# Altium PCB Flow_Pump.PcbDoc (part 2 of 3)
Units mm, origin at the board's own origin, x right, y up, seen from the top; angles counter-clockwise.
Board outline 210 x 210 mm, 2 copper layers (Top Layer, Bottom Layer); 275 components, 189 nets, 896 pads, 730 vias.
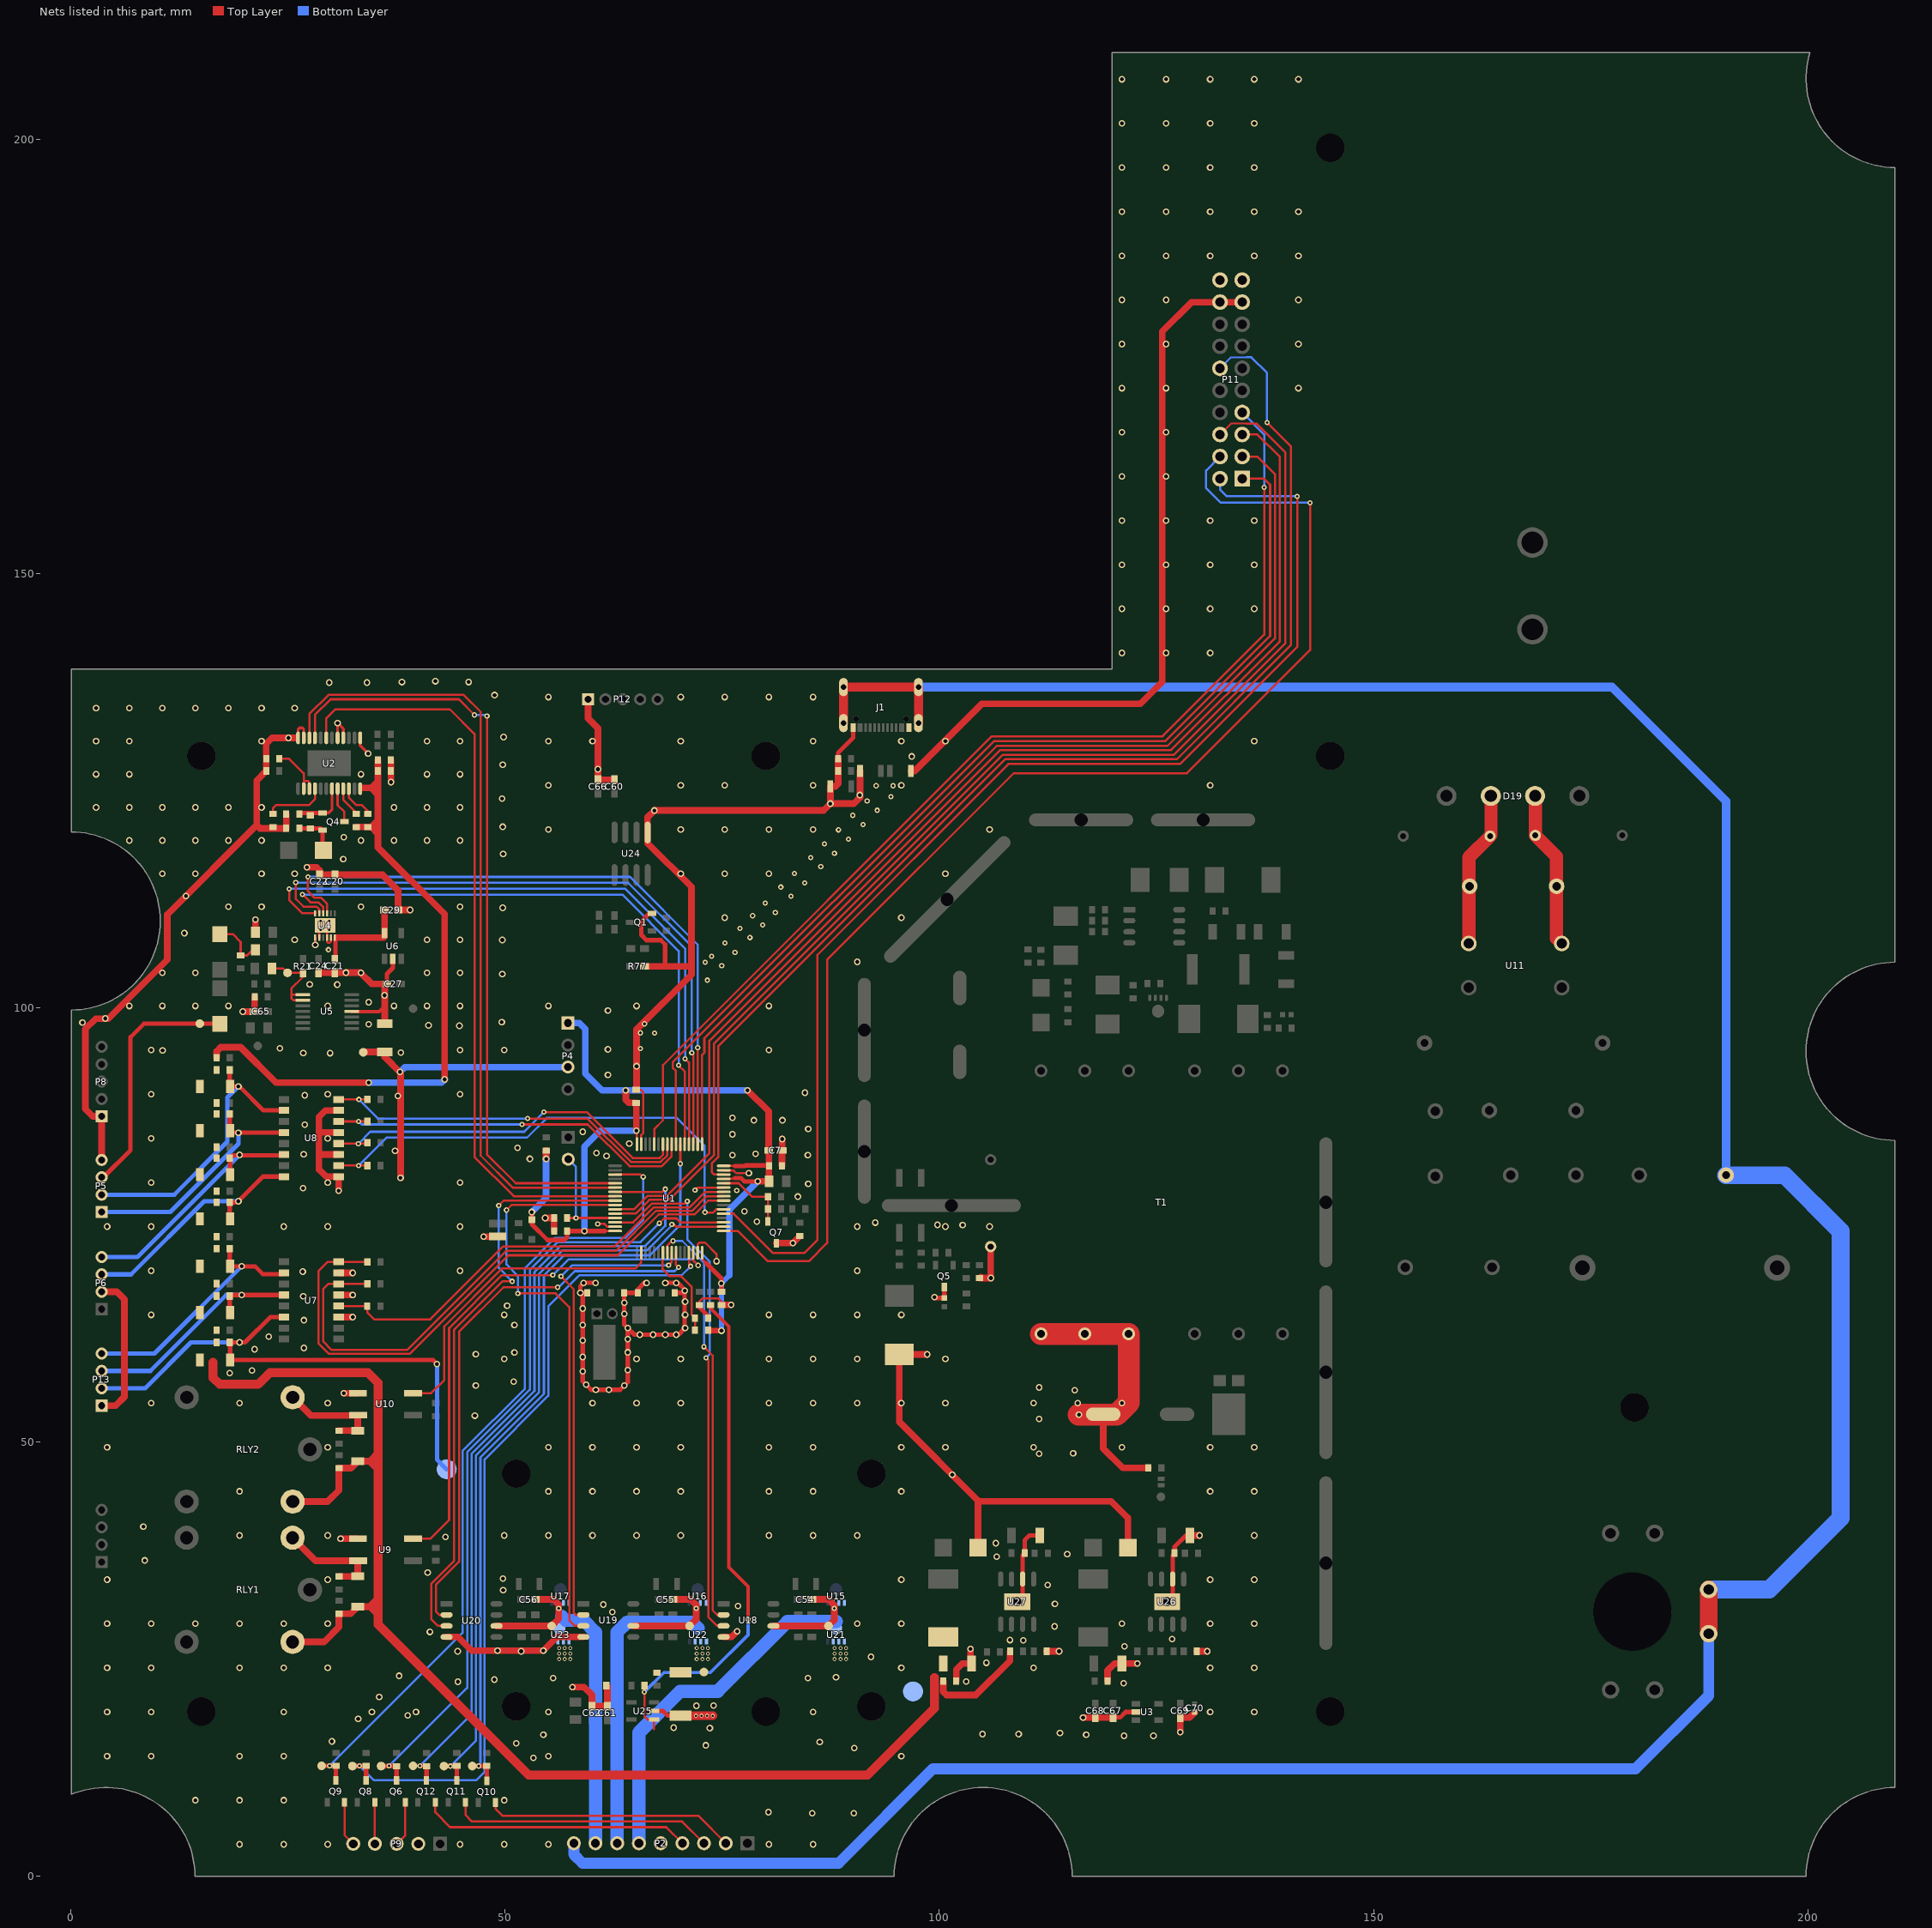
[diagram p2: the nets of this part, all layers, seen from the top]

## Via types
v1: diameter 0.762, hole 0.457, Top Layer to Bottom Layer, tented both sides, 554 vias
v2: diameter 0.61, hole 0.305, Top Layer to Bottom Layer, tented both sides, 99 vias
v3: diameter 0.45, hole 0.25, Top Layer to Bottom Layer, tented both sides, 70 vias
v4: diameter 0.5, hole 0.25, Top Layer to Bottom Layer, 4 vias
v5: diameter 1.5, hole 1, Top Layer to Bottom Layer, 2 vias
v6: diameter 1.27, hole 0.711, Top Layer to Bottom Layer, tented both sides, 1 vias

## Nets (pads, with @x,y where several pads share a name; then routed paths per layer and width w, separated by ;. In a path a pad name is that pad's centre, name@x,y a point inside that pad or via, vN(x,y) a via of type N, cw(c..) or ccw(c..) an arc to the next point about the centre after c; other vN are vias at no path point) (continued)
24V_F: C12.2 C13.2 C14.2 C15.2 C31.1 C32.1 C33.1 C34.1 C35.1 C36.1 C37.1 C79.2 C80.1 D8.2 D9.2 D10.2 D11.2 D12.2 D13.2 D15.2 D16.2 D17.2 L2.2 R26.2 R28.2 R30.2 R32.2 R34.2 R36.2 R40.2 R42.2 R43.2 R90.1 RLY1.4 RLY2.4 U2.24 | length 249.1
  Top Layer w0.762: R28.2@16.804,94.234 16.804,94.985 17.272,95.453 19.558,95.453 23.647,91.364 v1(34.29,91.364) ; RLY1.4@25.535,26.99 29.149,26.99 30.881,28.722 R42.2@30.881,30.231 32.222,30.231 D16.2@33.04,31.049 35.382,31.049 ; RLY2.4@25.547,43.149 29.56,43.149 30.881,44.47 R43.2@30.881,46.995 32.25,46.995 D17.2@33.04,47.785 35.382,47.785 ; C13.2@32.884,120.801 C12.2@34.195,120.801 35.338,120.801 35.362,120.777 ; 33.615,125.298 35.362,125.298 ; 35.357,120.039 34.595,120.801 35.357,121.563 ; 35.357,124.536 34.595,125.298 35.357,126.06 ; C14.2@35.362,128.524 C15.2@35.362,127.254 35.362,125.298 ; 35.484,29.972 34.392,31.064 35.484,32.156 ; 35.509,46.693 34.417,47.785 35.509,48.877 ; v1(43.053,91.745) 43.053,110.769 35.362,118.46 35.362,120.777 ; C80.1@100.457,22.479 100.457,21.26 100.838,20.879 104.216,20.879 108.153,24.816 R90.1@108.153,25.908 ; 35.362,120.777 35.362,125.298
  Top Layer w1.016: 16.383,59.182 16.383,57.404 17.145,56.642 21.59,56.642 22.936,57.988 34.214,57.988 35.382,56.82 35.382,47.785 35.382,31.049 35.382,29.007 52.73,11.659 91.744,11.659 99.441,19.356 99.441,22.86
  Bottom Layer w0.762: v1(34.29,91.364) 42.697,91.364 43.078,91.745 v1(43.053,91.745)
+3.3VA: C21.1 C29.1 U4.12 U6.5 | length 11.2
  Top Layer w0.508: C21.1@30.403,105.562 30.484,105.643 U4.12@30.484,108.074
  Top Layer w0.762: 30.611,108.074 36.004,108.074 36.138,108.207 U6.5@36.138,108.573 36.138,111.245 C29.1@36.131,111.252
AC_L: C43.2 C57.2 D19.2 U11.4 | length 18.2
  Top Layer w1.524: D19.2@168.631,124.308 168.631,119.841 171.08,117.391 C57.2@171.08,113.991 171.08,107.975 U11.4@171.668,107.387
AC_N: C57.1 C58.1 D19.3 U11.3 | length 18
  Top Layer w1.524: U11.3@160.968,107.387 160.968,117.31 163.53,119.872 D19.3@163.53,124.308
Adc_input: C23.2 R21.1 T8.1 U5.1 U5.2 | length 9.9
  Top Layer w0.254: C23.2@23.182,104.518 24.455,104.518 T8.1@24.96,104.013 26.713,104.013 26.713,103.529 25.4,102.216 25.4,101.473 ; U5.2@26.712,100.867 25.625,100.867 25.4,101.092 25.4,101.473 ; U5.1@26.712,101.517 25.444,101.517 25.4,101.473
AGND: C14.1 C15.1 C16.2 C17.2 C18.1 C19.1 C20.2 C21.2 C22.2 C24.2 C25.1 C27.2 C29.2 C65.2 P5.4 P8.1 R16.2 R20.1 R25.2 U2.1 U2.4 U2.5 U2.11 U2.12 U4.7 U4.8 U4.10 U4.11 U4.13 U5.11 U6.2 | length 124.7
  Top Layer w0.254: v1(28.153,107.223) U4.7@28.153,108.074 ; U4.8@28.603,108.074 28.603,108.799 U4.13@29.278,109.474 29.503,109.249 U4.10@29.503,108.074 29.503,107.581 29.616,107.467 29.794,107.467 29.951,107.624 U4.11@29.953,108.074
  Top Layer w0.33: U2.12@26.175,131.068 26.175,132.049 26.333,132.207 26.67,132.207 26.825,132.052 U2.11@26.825,131.068 ; U2.5@30.725,131.068 v1(30.725,132.757) 31.375,132.107 U2.4@31.375,131.068 ; U2.1@33.325,131.068 33.325,130.175 v1(34.239,129.261)
  Top Layer w0.381: U5.11@32.351,99.567 35.52,99.567 36.156,100.203
  Top Layer w0.508: C27.2@36.41,102.743 36.41,103.897 37.088,104.575 U6.2@37.088,105.623
  Top Layer w0.762: P5.4@3.556,82.477 P8.1@3.556,87.494 2.549,87.494 1.676,88.367 1.676,97.536 2.883,98.742 4.305,98.742 11.125,105.562 11.125,110.744 21.412,121.031 ; v1(19.802,99.552) C65.2@21.125,99.552 21.174,99.601 C25.1@21.174,101.242 ; v1(21.26,110.134) 21.26,108.705 R20.1@21.269,108.696 ; C19.1@24.808,122.301 C18.1@24.808,120.65 21.793,120.65 21.412,121.031 ; 25.908,131.068 23.194,131.068 22.511,130.385 C17.2@22.511,128.651 R16.2@22.511,127.254 21.412,126.155 21.412,121.031 ; v1(27.203,116.18) 28.296,116.18 28.643,115.832 C22.2@28.643,115.3 C20.2@30.421,115.3 35.906,115.3 37.68,113.527 C29.2@37.68,111.252 v1(39.065,111.252) ; C24.2@28.516,104.013 C21.2@30.403,104.013 v1@31.725,104.013 ; v1(31.699,104.038) 33.376,104.038 34.671,102.743 C27.2@36.41,102.743 36.156,102.489 36.156,100.203 36.156,98.164 R25.2@36.144,98.153 ; v1(36.862,125.977) C15.1@36.862,127.254 C14.1@36.862,128.524
  other v1: 44.755,97.917 41.199,97.968 34.315,98.095 1.346,98.298 49.632,98.335 3.988,98.755 6.731,100.203 10.541,100.203 14.351,100.203 18.161,100.203 29.591,100.203 37.211,100.203 41.021,100.203 44.831,100.203 34.315,100.635 36.131,101.422 30.683,102.667 27.508,102.692 49.682,103.886 10.541,104.013 14.351,104.013 33.401,104.013 41.021,104.013 44.831,104.013 49.682,107.798 25.781,107.823 41.021,107.823 44.831,107.823 13.081,108.585 49.733,111.506 18.161,111.633 21.971,111.633 33.401,111.633 44.831,111.633 13.259,112.852 10.541,115.443 14.351,115.443 21.971,115.443 25.781,115.443 31.375,117.119 49.784,117.704 6.731,119.253 10.541,119.253 14.351,119.253 18.161,119.253 21.971,119.253 33.401,119.253 37.211,119.253 41.021,119.253 44.831,119.253 31.445,119.634 49.733,120.828 2.921,123.063 6.731,123.063 10.541,123.063 14.351,123.063 18.161,123.063 21.971,123.063 37.211,123.063 41.021,123.063 44.831,123.063 49.657,124.079 2.921,126.873 6.731,126.873 33.401,126.873 41.021,126.873 44.831,126.873 49.733,127.965 2.921,130.683 6.731,130.683 21.971,130.683 41.021,130.683 44.831,130.683 25.07,131.068 49.835,131.166 2.921,134.493 6.731,134.493 10.541,134.493 14.351,134.493 18.161,134.493 21.971,134.493 25.781,134.493 48.793,135.992 29.769,137.439 34.112,137.439 38.125,137.49 45.822,137.49 41.986,137.592
  other v2: 29.667,106.68
  other v4: 28.778,108.974 29.778,108.974 28.778,109.974 29.778,109.974
AI0: D6.1 P5.3 T7.1 | length 28.6
  Top Layer w0.508: P5.3@3.556,80.477 3.769,80.477 6.883,83.591 6.883,96.622 8.415,98.153 T7.1@14.877,98.153 ; T7.1@14.859,98.171 T7.1@14.877,98.153 ; D6.1@17.166,98.153 T7.1@14.877,98.153
AO_BOOST: Q4.3 U2.20 | length 4.1
  Top Layer w0.254: U2.20@30.725,125.218 30.725,123.326 31.499,122.552 Q4.3@31.499,121.428
AO_IOUT: C19.2 Q4.1 R18.1 U2.19 | length 6.4
  Top Layer w0.254: 30.075,124.421 U2.19@30.075,125.218
  Top Layer w0.33: Q4.1@28.999,122.428 29.718,122.428 30.075,122.785 30.075,124.421
  Top Layer w0.508: C19.2@26.308,122.301 26.435,122.428 Q4.1@28.999,122.428
BOOT0: P1.2 R3.1 U1.61 | length 12.7
  Top Layer w0.254: R3.1@57.15,75.795 v2(58.166,75.795) U1.61@62.684,75.795
  Bottom Layer w0.254: P1.2@57.277,82.55 58.166,81.661 v2(58.166,75.795)
DI_0: C31.2 D9.1 P5.2 U8.2 | length 33.1
  Top Layer w0.508: C31.2@18.304,92.837 18.304,90.98 D9.1@18.352,90.932 19.431,90.932 22.188,88.175 U8.2@24.542,88.175
  Bottom Layer w0.508: P5.2@3.556,78.477 11.929,78.477 18.034,84.582 18.034,89.662 v1(19.304,90.932)
DI_1: C33.2 D11.1 P5.1 U8.4 | length 28.5
  Top Layer w0.508: C33.2@18.304,87.757 18.304,85.9 D11.1@18.352,85.852 18.569,85.635 U8.4@24.542,85.635
  Bottom Layer w0.508: P5.1@3.556,76.477 11.453,76.477 19.304,84.328 v1(19.304,85.598)
DI_2: C35.2 D13.1 P6.4 U8.6 | length 29.1
  Top Layer w0.508: D13.1@18.352,80.772 18.352,82.629 C35.2@18.304,82.677 18.641,83.014 24.542,83.014 U8.6@24.542,83.095
  Bottom Layer w0.508: P6.4@3.556,71.301 7.674,71.301 v1(19.431,83.058)
DI_3: C37.2 D15.1 P6.3 U8.8 | length 28.6
  Top Layer w0.508: D15.1@18.352,75.692 18.304,75.74 C37.2@18.304,77.597 19.177,77.597 22.135,80.555 U8.8@24.542,80.555
  Bottom Layer w0.508: P6.3@3.556,69.301 6.944,69.301 15.367,77.724 v1(19.304,77.724)
DI_4: C36.2 D8.1 P13.4 U7.2 | length 28.9
  Top Layer w0.508: C36.2@18.304,72.263 18.304,70.279 D8.1@18.352,70.231 21.209,70.231 22.098,69.342 U7.2@24.542,69.342
  Bottom Layer w0.508: P13.4@3.556,60.189 9.643,60.189 v1(19.685,70.231)
DI_5: C34.2 D10.1 P13.3 U7.4 | length 28.5
  Top Layer w0.508: D10.1@18.352,64.897 18.304,64.945 C34.2@18.304,66.802 ; U7.4@24.542,66.929 v1(19.685,66.929) 18.685,66.929 ; C34.2@18.304,66.802 18.431,66.675 18.685,66.929 ; C34.2@18.304,66.802 18.431,66.929 18.685,66.929
  Bottom Layer w0.508: P13.3@3.556,58.189 9.167,58.189 17.907,66.929 v1(19.685,66.929)
DI_6: C32.2 D12.1 P13.2 U7.6 U28.1 | length 64.1
  Top Layer w0.508: U7.6@24.542,64.389 22.987,64.389 20.066,61.468 C32.2@18.304,61.468 18.352,61.42 D12.1@18.352,59.436 41.707,59.436 v1(42.164,58.979)
  Bottom Layer w0.508: P13.2@3.556,56.189 8.564,56.189 13.843,61.468 v1(19.431,61.468) ; v1(42.164,58.979) 42.164,47.981 U28.1@43.282,46.863
DI_IN0: R29.2 U1.41 U8.16 | length 43.4
  Top Layer w0.254: U8.16@30.842,89.445 v2(33.172,89.445) R29.2@34.152,89.445 ; v2(52.603,87.249) 59.487,87.249 64.491,82.245 67.936,82.245 68.684,82.993 U1.41@68.684,84.295
  Bottom Layer w0.254: v2(33.172,89.445) 35.368,87.249 v2(52.603,87.249)
DI_IN1: R33.2 U1.40 U8.14 | length 43.3
  Top Layer w0.254: U8.14@30.842,86.905 v2(33.147,86.905) R33.2@34.152,86.905 ; v2(51.968,86.563) 59.538,86.563 64.338,81.763 68.047,81.763 69.184,82.9 U1.40@69.184,84.295
  Bottom Layer w0.254: v2(33.147,86.905) 33.489,86.563 v2(51.968,86.563)
DI_IN2: R37.2 U1.42 U8.12 | length 43.5
  Top Layer w0.254: U8.12@30.842,84.365 34.062,84.365 R37.2@34.152,84.455 ; v2(54.483,87.986) 59.411,87.986 64.694,82.702 67.818,82.702 68.184,83.068 U1.42@68.184,84.295
  Bottom Layer w0.254: v2(33.122,84.353) 34.493,85.725 52.222,85.725 v2(54.483,87.986)
DI_IN3: R41.2 U1.22 U8.10 | length 56.8
  Top Layer w0.254: U8.10@30.842,81.825 R41.2@34.152,81.825 ; v2(73.025,76.454) 73.076,76.403 73.944,76.403 74.336,76.795 U1.22@75.184,76.795
  Bottom Layer w0.254: v2(33.147,81.813) 36.373,85.039 52.527,85.039 54.813,87.325 69.774,87.325 72.974,84.125 72.974,76.473 72.993,76.454 v2(73.025,76.454)
DI_IN4: R27.2 U1.24 U7.16 | length 68.9
  Top Layer w0.254: R27.2@34.152,70.739 U7.16@30.842,70.739 29.591,70.739 28.516,69.664 28.516,61.375 29.743,60.147 39.04,60.147 50.394,71.501 62.992,71.501 67.692,76.201 69.876,76.201 69.878,76.2 71.801,76.2 73.396,77.795 U1.24@75.184,77.795
DI_IN5: R31.2 U1.25 U7.14 | length 65.2
  Top Layer w0.254: R31.2@34.152,68.199 U7.14@30.842,68.199 29.659,68.199 29.053,67.593 29.053,61.6 30.048,60.604 38.71,60.604 50.114,72.009 62.778,72.009 67.377,76.608 70.045,76.608 70.046,76.606 71.526,76.606 73.215,78.295 U1.25@75.184,78.295
DI_IN6: R35.2 U1.26 U7.12 | length 51.5
  Top Layer w0.254: U7.12@30.842,65.659 R35.2@34.15,65.659 34.15,64.91 34.925,64.135 41.402,64.135 49.784,72.517 62.611,72.517 67.108,77.014 70.213,77.014 70.214,77.013 71.252,77.013 73.034,78.795 U1.26@75.184,78.795
DIN_AO: U1.53 U2.9 | length 90.7
  Top Layer w0.254: U2.9@28.125,131.068 28.125,133.721 29.913,135.509 44.679,135.509 v2(46.482,133.706) ; v2(47.93,133.579) 47.93,83.109 51.244,79.795 U1.53@62.684,79.795
  Bottom Layer w0.254: v2(46.482,133.706) 47.904,133.706 47.93,133.68 v2(47.93,133.579)
DO0: C38.1 D16.1 RLY1.1 U9.4 | length 12.6
  Top Layer w0.762: RLY1.1@25.535,38.99 28.198,36.327 U9.4@33.093,36.327 33.04,36.274 D16.1@33.04,34.549 33.016,34.525 C38.1@30.881,34.525
DO1: C39.1 D17.1 RLY2.1 U10.4 | length 12.3
  Top Layer w0.762: RLY2.1@25.547,55.149 27.658,53.038 33.04,53.038 D17.1@33.04,51.285 33.012,51.313 C39.1@30.881,51.313
DO_ctrl_0: U1.14 U9.2 | length 61.1
  Top Layer w0.254: U9.2@39.418,38.867 41.382,38.867 43.561,41.046 43.561,63.119 49.657,69.215 v2(55.499,69.215) ; U1.14@71.684,71.795 71.684,70.891 v2(72.238,70.337)
  Bottom Layer w0.254: v2(55.499,69.215) 57.325,71.041 71.534,71.041 v2(72.238,70.337)
DO_ctrl_1: U1.2 U10.2 | length 37.3
  Top Layer w0.254: U10.2@39.418,55.631 41.509,55.631 43.002,57.125 43.002,63.322 49.657,69.977 65.024,69.977 65.684,70.637 U1.2@65.684,71.795
DOUT_AO: U1.54 U2.10 | length 92.3
  Top Layer w0.254: U2.10@27.475,131.068 27.475,133.811 29.681,136.017 45.237,136.017 47.193,134.061 47.193,82.982 50.88,79.295 U1.54@62.684,79.295
EA: P9.3 Q6.2 | length 5.2
  Top Layer w0.254: P9.3@37.527,3.75 38.516,4.739 Q6.2@38.516,8.543
EARTH: J1.1 P2.9 P14.1 P14.2 R53.1 | length 378.5
  Top Layer w1.016: J1.1@88.971,132.766 J1.1@88.971,136.916 J1.1@97.611,136.916 J1.1@97.611,132.766
  Top Layer w2.032: P14.1@188.595,27.94 P14.2@188.595,33.02
  Bottom Layer w1.016: J1.1@97.611,136.916 101.809,136.916 177.46,136.916 190.602,123.774 R53.1@190.602,80.721
  Bottom Layer w1.27: P2.9@57.92,3.81 57.92,2.532 58.928,1.524 88.417,1.524 99.263,12.37 180.162,12.37 188.595,20.803 P14.1@188.595,27.94
  Bottom Layer w2.032: P14.2@188.595,33.02 195.555,33.02 203.784,41.25 203.784,74.27 197.333,80.721 R53.1@190.602,80.721
EB: P9.4 Q8.2 | length 4.8
  Top Layer w0.254: Q8.2@35.01,8.543 35.01,3.766 P9.4@35.027,3.75
EXTPROC_SPI2_ADC_CS3: U1.34 U4.3 | length 76.6
  Top Layer w0.254: v2(27.305,115.062) 27.305,113.411 28.067,112.649 28.829,112.649 29.503,111.975 U4.3@29.503,110.874 ; U1.34@72.184,84.295 72.187,84.298 v2(72.187,95.402)
  Bottom Layer w0.254: v2(27.305,115.062) 64.389,115.062 72.187,107.264 v2(72.187,95.402)
EXTPROC_SPI2_MISO: U1.36 U4.6 | length 76.1
  Top Layer w0.254: v2(25.146,113.665) 25.146,112.415 26.687,110.874 U4.6@28.153,110.874 ; v2(70.739,94.132) 71.184,93.687 U1.36@71.184,84.295
  Bottom Layer w0.254: v2(25.146,113.665) 25.197,113.716 63.822,113.716 70.739,106.799 v2(70.739,94.132)
EXTPROC_SPI2_MOSI: U1.37 U4.4 | length 72.3
  Top Layer w0.254: v2(26.67,113.03) 26.67,113.076 27.605,112.141 28.521,112.141 29.053,111.609 U4.4@29.053,110.874 ; v2(70.002,93.37) 70.002,93.345 70.684,92.663 U1.37@70.684,84.295
  Bottom Layer w0.254: v2(26.67,113.03) 63.5,113.03 70.002,106.528 v2(70.002,93.37)
EXTPROC_SPI2_SCLK: U1.35 U4.5 | length 77
  Top Layer w0.254: v2(25.908,114.427) 25.908,112.522 26.797,111.633 28.321,111.633 28.603,111.351 U4.5@28.603,110.874 ; v2(71.501,94.818) 71.684,94.635 U1.35@71.684,84.295
  Bottom Layer w0.254: v2(25.908,114.427) 25.959,114.376 64.186,114.376 71.501,107.061 v2(71.501,94.818)
EZ: P9.5 Q9.2 | length 5.2
  Top Layer w0.254: Q9.2@31.531,8.543 31.531,4.746 P9.5@32.527,3.75
FAULT: P11.12 U1.30 | length 140.5
  Top Layer w0.254: U1.30@75.184,80.795 74.094,80.795 73.812,81.077 73.812,82.067 74.549,82.804 74.549,95.555 107.594,128.6 127.356,128.6 140.513,141.757 140.513,164.617 137.77,167.361 v2(137.744,167.361)
  Bottom Layer w0.203: P11.12@132.334,173.609 133.604,174.879 135.416,174.879
  Bottom Layer w0.254: 135.416,174.879 135.941,174.879 137.744,173.076 v2(137.744,167.361)
GND: C1.2 C2.2 C3.1 C4.1 C5.2 C6.2 C7.2 C8.1 C9.1 C10.1 C11.1 C40.2 C41.2 C48.2 C53.1 C59.1 C60.2 C61.2 C62.2 C64.1 C66.2 C67.2 C68.2 C69.2 C70.2 C71.2 C73.1 C74.1 C75.2 C76.2 C78.1 C79.1 C80.2 D2.1 D3.1 D4.1 D24.1 D29.1 D30.1 J1.A1 J1.A12 J1.B1 J1.B12 P2.5 P4.3 P6.2 P9.2 P11.17 P11.18 P11.19 P11.20 P12.1 P13.1 Q1.2 Q5.3 Q7.3 R3.2 R17.2 R25.1 R66.2 R77.1 R79.2 R85.2 R86.1 R89.2 SC1.2 T1.7 T1.8 T1.9 T3.1 U1.15 U1.27 U1.31 U1.47 U1.63 U3.2 U7.11 U7.13 U7.15 U8.9 U8.11 U8.13 U8.15 U9.3 U10.3 U18.4 U19.4 U20.4 U24.5 U25.2 U26.6 U26.9 U27.6 U27.9 U29.1 | length 519.1
  Top Layer w0.254: v2(60.681,75.108) 61.443,75.108 61.755,74.795 U1.63@62.684,74.795 ; C10.1@65.1,90.551 65.151,90.551 65.659,90.551 65.913,90.297 65.913,85.562 65.684,85.333 U1.47@65.684,84.295 ; v2(71.882,78.994) 72.183,79.295 U1.27@75.184,79.295 ; U1.15@72.184,71.795 72.184,72.743 72.415,72.974 73.025,72.974 74.346,71.653 v1(74.346,70.815) ; C53.1@72.39,65.786 72.39,66.192 72.715,66.517 74.58,66.517 74.93,66.167 C8.1@74.93,65.786 ; U1.31@75.184,81.295 75.224,81.255 76.327,81.255 76.632,80.95 v1(78.08,80.95)
  Top Layer w0.508: C5.2@59.46,67.183 v1(58.674,67.183) ; v1(60.42,68.326) v1(59.055,68.326) 58.674,67.945 v1(58.674,67.183) ; v1(66.294,68.326) 66.04,68.326 65.288,67.574 C1.2@65.288,67.183 C6.2@63.73,67.183 63.73,63.524 v1(64.135,63.119) ; Q1.2@66.929,110.842 66.569,110.842 65.684,109.956 65.684,108.382 66.294,107.772 67.945,107.772 68.428,107.29 68.428,104.775 ; U25.2@67.158,19.039 68.185,19.039 68.724,18.5 R86.1@70.219,18.5 ; v1(68.453,68.326) 69.887,68.326 70.694,67.519 v1(70.694,67.437) ; C2.2@69.549,67.183 70.44,67.183 v1(70.694,67.437) ; C53.1@72.39,65.786 72.39,65.507 73.382,64.515 C59.1@73.382,64.262 ; C3.1@88.362,128.651 88.362,129.358 90.094,131.089 J1.B1@90.094,132.232 ; v1(99.441,66.675) 99.531,66.585 C48.2@100.582,66.585 Q5.3@100.582,67.855 ; v5(108.966,31.623) 109.601,32.258 U27.6@109.601,34.223 109.601,36.991 C78.1@109.831,37.221 109.831,38.712 110.372,39.253 C76.2@111.581,39.253 ; C67.2@120.015,18.288 120.828,18.288 121.463,18.923 U3.2@122.652,18.923 ; v5(126.238,31.623) 126.873,32.258 U26.6@126.873,34.223 126.873,36.991 C73.1@127.103,37.221 127.103,37.949 128.407,39.253 C71.2@128.853,39.253 ; v1(58.674,67.183) 58.674,67.081 58.953,66.802 v1(58.953,65.38) v1(58.953,63.475) v1(58.953,61.697) v1(58.953,59.792) v1(58.953,58.141) 58.953,56.998 v1(59.334,56.617) 59.944,56.007 v1(60.452,56.007) v1(61.976,56.007) 63.246,56.007 64.135,56.896 v1(64.135,63.119) ; v1(64.135,63.119) 64.897,62.357 v1(69.723,62.357) 69.977,62.357 v1(70.739,63.119) 70.694,63.164 v1(70.694,67.437)
  Top Layer w0.762: P13.1@3.556,54.189 5.167,54.189 6.172,55.194 6.172,66.421 5.292,67.301 P6.2@3.556,67.301 ; U7.11@30.842,64.389 v1(32.461,64.389) ; U7.13@30.842,66.929 v1(32.461,66.929) ; U7.15@30.842,69.469 v1(32.461,69.469) ; v1(30.842,78.925) U8.9@30.842,80.555 29.402,80.555 28.575,81.382 28.575,83.16 ; U8.11@30.842,83.095 28.64,83.095 28.575,83.16 ; U8.13@30.842,85.635 28.716,85.635 28.575,85.776 ; U8.15@30.842,88.175 29.323,88.175 28.575,87.427 28.575,85.776 ; v1(31.069,38.867) U9.3@33.068,38.867 ; v1(31.449,55.631) U10.3@33.068,55.631 ; T3.1@33.68,94.869 33.714,94.903 R25.1@36.144,94.903 ; 36.156,94.324 37.973,92.507 v1(37.973,80.403) ; U20.4@43.272,27.559 44.577,27.559 46.152,25.984 v1(54.423,25.984) 56.003,27.564 U19.4@59.03,27.564 ; v1(47.549,73.635) 49.124,73.635 SC1.2@49.149,73.66 ; v1(54.634,75.795) R3.2@55.65,75.795 C9.1@55.65,74.295 ; v1(57.76,21.793) 59.106,21.793 60.016,20.883 C62.2@60.016,19.588 C61.2@61.794,19.588 61.794,21.833 R79.2@61.667,21.96 ; P12.1@59.564,135.509 59.564,133.324 60.706,132.182 C66.2@60.706,126.238 C60.2@62.611,126.238 ; C10.1@65.151,90.551 65.151,97.511 71.476,103.835 71.476,113.894 66.421,118.948 U24.5@66.421,120.179 66.421,121.92 v1(67.208,122.707) 86.675,122.707 v1(87.462,123.495) ; R77.1@66.065,104.775 68.428,104.775 71.247,104.775 ; C8.1@74.93,65.786 v1(76.048,65.786) ; U18.4@75.159,27.564 76.078,27.564 v1(76.733,28.219) ; Q7.3@81.255,72.898 v1(83.161,72.898) R85.2@83.947,73.684 ; C11.1@81.891,81.788 81.891,83.542 C7.2@81.915,83.566 v1(81.915,84.887) ; C3.1@88.362,128.651 C4.1@88.362,127.254 88.362,125.802 88.036,125.476 D2.1@87.462,125.476 v1(87.462,123.495) ; D4.1@90.881,127.254 90.881,124.206 90.17,123.495 v1(87.462,123.495) ; D3.1@96.72,127.254 97.18,127.254 104.902,134.976 123.139,134.976 125.679,137.516 125.679,177.851 129.057,181.229 P11.18@132.334,181.229 P11.17@134.874,181.229 ; v1(98.621,60.089) D24.1@95.391,60.089 95.391,52.335 104.457,43.269 ; C80.2@101.957,22.479 101.957,23.801 102.667,24.511 C79.1@103.707,24.511 103.607,24.611 v1(103.607,26.187) ; D30.1@104.457,37.846 104.457,43.269 ; R66.2@104.646,68.871 R66.2@104.787,69.012 ; R66.2@104.914,68.885 v1(105.943,68.885) 105.943,69 105.932,69.012 105.918,68.998 C64.1@105.918,72.502 ; R89.2@112.371,25.908 v1(113.792,25.908) ; v1(116.561,18.288) C68.2@117.983,18.288 C67.2@120.015,18.288 ; C41.2@118.883,53.162 118.883,49.265 121.121,47.027 C40.2@124.077,47.027 ; C75.2@119.38,22.479 119.38,23.698 120.193,24.511 C74.1@121.031,24.511 v1(122.809,24.511) ; D29.1@121.729,37.846 121.729,41.263 119.812,43.18 104.546,43.18 104.457,43.269 ; v1(127.762,16.612) C69.2@127.762,18.288 128.814,18.288 C70.2@129.413,18.887 ; C71.2@128.853,39.253 129.962,39.253 v1(129.972,39.243) ; R17.2@129.643,25.908 v1(130.861,25.908) ; 28.575,83.16 28.575,85.776
  Top Layer w1.016: R86.1@70.219,18.5 v3(72.009,18.5) v3(72.644,18.5) v3(73.279,18.5) v3(73.914,18.5)
  Top Layer w2.54: T1.7@111.711,62.447 T1.8@116.761,62.447 T1.9@121.811,62.447 121.811,54.528 120.445,53.162 118.883,53.162 v1(116.078,53.162)
  Bottom Layer w0.762: v1(37.922,92.608) 38.481,93.167 P4.3@57.252,93.167
  other v1: 19.431,3.683 24.511,3.683 29.591,3.683 44.831,3.683 49.911,3.683 54.991,3.683 80.391,3.683 85.471,3.683 85.369,7.264 90.17,7.264 80.34,7.391 14.351,8.763 19.431,8.763 24.511,8.763 49.911,8.763 53.264,13.64 4.191,13.843 9.271,13.843 19.431,13.843 24.511,13.843 54.991,13.843 95.631,13.843 90.221,14.783 73.127,15.088 51.283,15.316 86.233,15.469 30.074,15.545 121.285,16.18 124.663,16.18 54.423,16.307 116.916,16.307 104.978,16.383 109.144,16.383 113.894,16.51 73.584,17.069 69.418,17.12 33.096,18.136 38.811,18.517 4.191,18.923 9.271,18.923 24.511,18.923 34.671,18.923 39.751,18.923 54.991,18.923 85.471,18.923 131.191,18.923 136.271,18.923 72.034,19.634 74.016,19.66 35.509,20.65 121.234,22.225 44.577,22.403 103.099,22.428 48.768,22.657 55.55,22.835 84.887,22.835 88.113,22.936 37.821,23.089 4.191,24.003 9.271,24.003 19.431,24.003 24.511,24.003 29.591,24.003 95.631,24.003 110.871,24.003 131.191,24.003 136.271,24.003 105.435,24.587 92.151,25.273 44.552,25.908 51.867,25.908 49.149,25.984 121.336,26.492 109.677,27.178 108.128,27.203 126.822,27.305 41.351,28.143 113.284,28.778 4.191,29.083 9.271,29.083 14.351,29.083 19.431,29.083 24.511,29.083 29.591,29.083 90.551,29.083 95.631,29.083 121.031,29.083 131.191,29.083 136.271,29.083 62.357,30.429 76.835,31.115 61.316,31.293 113.309,31.369 49.784,32.944 112.497,33.528 4.191,34.163 29.591,34.163 95.631,34.163 131.191,34.163 136.271,34.163 49.759,34.29 41.097,34.976 8.534,36.373 106.604,36.805 114.732,37.084 106.502,38.354 43.155,39.065 19.431,39.243 29.591,39.243 49.911,39.243 54.991,39.243 60.071,39.243 65.151,39.243 70.231,39.243 80.391,39.243 85.471,39.243 90.551,39.243 136.271,39.243 8.357,40.259 19.431,44.323 54.991,44.323 60.071,44.323 65.151,44.323 70.231,44.323 80.391,44.323 85.471,44.323 95.631,44.323 131.191,44.323 136.271,44.323 101.498,46.228 111.506,48.666 115.418,48.717 4.191,49.403 29.591,49.403 54.991,49.403 60.071,49.403 65.151,49.403 70.231,49.403 80.391,49.403 85.471,49.403 95.631,49.403 100.711,49.403 110.871,49.403 121.031,49.403 131.191,49.403 136.271,49.403 111.506,52.654 46.533,53.035 9.271,54.483 19.431,54.483 29.591,54.483 60.071,54.483 65.151,54.483 70.231,54.483 80.391,54.483 85.471,54.483 90.551,54.483 95.631,54.483 100.711,54.483 110.871,54.483 115.951,54.483 121.031,54.483 115.595,55.956 111.506,56.286 46.634,56.515 63.754,56.515 51.003,56.947 18.288,57.937 20.879,58.242 64.135,58.293 49.911,59.563 65.151,59.563 70.231,59.563 80.391,59.563 85.471,59.563 90.551,59.563 100.711,59.563 46.634,60.122 51.079,60.3 64.135,60.325 21.158,60.681 26.848,60.833 64.135,61.849 22.784,62.128 65.532,62.357 67.056,62.357 68.453,62.357 51.079,63.475 26.848,64.033 9.271,64.643 49.911,64.643 70.739,64.643 80.391,64.643 85.471,64.643 90.551,64.643 95.631,64.643 63.754,64.77 50.241,65.684 63.754,66.04 70.739,66.167 26.772,66.777 69.723,68.326 26.712,69.621 9.271,69.723 44.831,69.723 90.551,69.723 4.191,74.803 9.271,74.803 24.511,74.803 29.591,74.803 44.831,74.803 90.551,74.803 100.711,74.803 105.791,74.803 102.692,74.981 99.797,75.006 92.634,75.26 78.994,75.387 77.572,76.556 83.718,78.257 26.738,79.223 84.912,79.731 9.271,79.883 29.591,79.883 44.831,79.883 52.857,82.601 61.697,82.931 76.175,83.033 84.861,83.033 26.822,83.134 78.867,83.185 60.528,83.287 37.338,83.515 51.435,83.871 64.313,84.365 9.271,84.963 29.591,84.963 76.175,85.42 58.953,85.725 84.912,86.055 26.949,86.538 78.664,87.046 81.94,87.046 76.175,87.325 37.668,89.84 26.949,89.916 9.271,90.043 29.591,90.043 44.831,90.043 84.531,90.221 61.849,92.278 65.151,93.269 29.87,94.767 26.772,94.793 37.998,94.844 10.566,95.072 9.271,95.123 44.831,95.123 49.911,95.123 80.391,95.123 61.849,95.199 24.079,95.326 61.849,99.67 54.991,100.203 65.151,100.203 80.391,100.203 90.551,105.283 75.311,110.363 95.631,110.363 70.231,115.443 75.311,115.443 80.391,115.443 100.711,115.443 54.991,120.523 70.231,120.523 75.311,120.523 80.391,120.523 85.471,120.523 105.791,120.523 90.856,124.485 54.991,125.603 70.231,125.603 75.311,125.603 85.471,125.603 95.631,125.603 131.191,125.603 60.706,127.457 96.825,128.93 54.991,130.683 60.071,130.683 70.231,130.683 85.471,130.683 95.631,130.683 100.711,130.683 136.271,130.683 54.991,135.763 70.231,135.763 75.311,135.763 80.391,135.763 85.471,135.763 121.031,140.843 126.111,140.843 131.191,140.843 121.031,145.923 126.111,145.923 131.191,145.923 136.271,145.923 121.031,151.003 126.111,151.003 131.191,151.003 136.271,151.003 121.031,156.083 126.111,156.083 131.191,156.083 136.271,156.083 121.031,161.163 126.111,161.163 121.031,166.243 126.111,166.243 121.031,171.323 126.111,171.323 141.351,171.323 121.031,176.403 126.111,176.403 141.351,176.403 121.031,181.483 126.111,181.483 141.351,181.483 121.031,186.563 126.111,186.563 131.191,186.563 136.271,186.563 141.351,186.563 121.031,191.643 126.111,191.643 131.191,191.643 136.271,191.643 141.351,191.643 121.031,196.723 126.111,196.723 131.191,196.723 136.271,196.723 121.031,201.803 126.111,201.803 131.191,201.803 136.271,201.803 121.031,206.883 126.111,206.883 131.191,206.883 136.271,206.883 141.351,206.883
  other v2: 76.683,78.943 65.608,95.301 67.234,97.079 65.608,97.104 66.065,98.146 73.304,103.175 74.955,104.851 73.05,105.232 73.787,105.918 76.479,106.375 75.311,107.442 78.207,108.077 77.038,109.144 79.68,109.525 78.511,110.592 81.128,110.973 79.959,112.039 82.931,112.827 81.763,113.894 84.506,114.376 83.337,115.443 86.36,116.23 85.192,117.297 87.935,117.78 86.766,118.847 89.56,119.405 88.392,120.472 91.211,121.082 90.043,122.149 92.862,122.733 91.694,123.8 94.437,124.282 92.735,125.552 94.691,125.552
HU: P2.2 Q10.2 | length 29.4
  Top Layer w0.254: 48.928,7.994 48.928,8.489 Q10.2@48.914,8.503 48.914,7.779 49.708,6.985 72.245,6.985 P2.2@75.42,3.81
HV: P2.3 Q11.2 | length 30.3
  Top Layer w0.254: Q11.2@45.45,8.543 45.45,7.077 46.203,6.325 70.405,6.325 P2.3@72.92,3.81
HW: P2.4 Q12.2 | length 31.1
  Top Layer w0.254: Q12.2@41.968,8.543 41.968,7.375 43.678,5.664 68.566,5.664 P2.4@70.42,3.81
IOUT0: C18.2 D5.1 Q4.2 R18.2 | length 5.1
  Top Layer w0.508: C18.2@26.308,120.65 R18.2@27.602,120.65 28.777,120.65 Q4.2@28.999,120.428 28.999,118.194 D5.1@29.083,118.11
is_adc: R73.1 R78.1 U25.1 | length 60.4
  Top Layer w0.254: R78.1@66.058,21.96 66.058,18.397 66.416,18.039 U25.1@67.158,18.039 67.158,16.944
  Top Layer w0.381: R73.1@73.66,65.786 73.66,65.405 75.755,63.309 75.755,35.605 77.978,33.382 v2(77.978,29.591)
  Bottom Layer w0.381: v2(66.04,21.209) 68.301,23.47 73.66,23.47 77.978,27.788 v2(77.978,29.591)
ISEN: R80.2 R86.2 T9.1 U21.1 U21.2 U21.3 U22.1 U22.2 U22.3 U23.1 U23.2 U23.3
  other v3: 56.231,25.019 56.881,25.019 57.531,25.019 72.065,25.019 72.715,25.019 73.365,25.019 87.963,25.019 88.613,25.019 89.263,25.019 56.231,25.654 56.881,25.654 57.531,25.654 72.065,25.654 72.715,25.654 73.365,25.654 87.963,25.654 88.613,25.654 89.263,25.654 56.231,26.289 56.881,26.289 57.531,26.289 72.065,26.289 72.715,26.289 73.365,26.289 87.963,26.289 88.613,26.289 89.263,26.289
KEYA: P11.5 U1.59 | length 137.8
  Top Layer w0.254: U1.59@62.684,76.795 64.857,76.795 66.421,78.359 68.661,78.359 73.533,83.231 73.533,96.19 107.01,129.667 126.695,129.667 139.217,142.189 139.217,163.398 136.627,165.989 P11.5@134.874,165.989
KEYB: P11.6 U1.60 | length 143.3
  Top Layer w0.203: P11.6@132.334,165.989 133.604,167.259 135.416,167.259
  Top Layer w0.254: U1.60@62.684,76.295 65.043,76.295 66.624,77.876 68.91,77.876 74.066,83.033 74.066,95.885 107.29,129.108 127,129.108 139.852,141.961 139.852,163.906 136.5,167.259 135.416,167.259
KEYSW: P11.7 U1.44 | length 125.9
  Top Layer w0.254: U1.44@67.184,84.295 67.184,86.031 68.184,87.031 68.184,93.378 106.047,131.242 125.705,131.242 137.414,142.951 v2(137.414,159.893)
  Bottom Layer w0.254: P11.7@134.874,168.529 137.414,165.989 v2(137.414,159.893)
LATCH_AO: U1.56 U2.7 | length 87.7
  Top Layer w0.254: U2.7@29.425,131.068 29.425,133.311 30.48,134.366 43.637,134.366 46.482,131.521 46.482,82.829 51.016,78.295 U1.56@62.684,78.295
LCD_BKL: P11.4 U1.17 | length 151.1
  Top Layer w0.254: U1.17@75.184,74.295 76.784,74.295 80.264,70.815 84.988,70.815 87.097,72.923 87.097,105.512 108.585,127 128.524,127 142.697,141.173 v2(142.697,158.14)
  Bottom Layer w0.254: P11.4@132.334,163.449 130.734,161.849 130.734,159.817 132.41,158.14 v2(142.697,158.14)
LCD_CLK: P11.3 U1.33 | length 120.6
  Top Layer w0.254: U1.33@72.684,84.295 72.684,94.564 72.949,94.829 72.949,96.469 106.629,130.15 126.289,130.15 138.659,142.519 138.659,161.417 136.627,163.449 P11.3@134.874,163.449
LCD_CS: P11.1 U1.39 | length 119.6
  Top Layer w0.254: U1.39@69.684,84.295 69.684,92.719 69.317,93.086 69.317,93.701 106.299,130.683 125.984,130.683 138.1,142.799 138.1,160.223 137.414,160.909 P11.1@134.874,160.909
LCD_SID: P11.2 U1.21 | length 143.9
  Top Layer w0.254: U1.21@75.184,76.295 76.314,76.295 80.854,71.755 84.455,71.755 85.979,73.279 85.979,106.096 107.95,128.067 127.737,128.067 141.224,141.554 v2(141.224,158.877)
  Bottom Layer w0.254: P11.2@132.334,160.909 132.334,159.639 133.096,158.877 v2(141.224,158.877)
MCU_3.3V: C7.1 C8.2 C9.2 C10.2 C11.2 D1.1 FB1.2 P4.1 R2.1 R74.1 U1.16 U1.29 U1.32 U1.48 U1.64 | length 119
  Top Layer w0.254: 61.468,74.295 U1.64@62.684,74.295 ; v1@65.151,85.725 65.184,85.692 U1.48@65.184,84.295 ; U1.16@72.684,71.795 72.684,71.08 73.152,70.612 ; U1.29@75.184,80.295 76.454,80.295 ; U1.32@75.184,81.795 76.447,81.795 76.454,81.788
  Top Layer w0.508: v1(53.086,76.479) 53.086,75.516 53.086,75.057 54.889,73.254 56.82,73.254 57.15,73.584 C9.2@57.15,74.295 v1(59.157,74.295) 61.468,74.295 ; 73.152,70.612 74.93,68.834 C8.2@74.93,67.286 ; 76.454,80.379 77.165,80.379 77.534,80.01 v1(79.096,80.01) ; 76.454,81.788 77.661,81.788 77.711,81.839 80.34,81.839 C11.2@80.391,81.788
  Top Layer w0.635: v1@65.151,85.725 65.151,86.233 ; R74.1@73.382,62.865 73.433,62.814 v1(74.93,62.814)
  Top Layer w0.762: v1(54.737,82.601) R2.1@54.737,83.565 ; v1(63.906,90.475) 63.906,89.408 64.263,89.051 C10.2@65.151,89.051 ; v1@65.126,86.134 C10.2@65.126,88.952 ; v1(77.927,90.5) 80.366,88.061 C7.1@80.366,83.566 80.391,83.541 C11.2@80.391,81.788 FB1.2@80.391,80.01 v1(79.096,80.01)
  Bottom Layer w0.635: v1(74.93,62.814) 74.93,68.301 75.844,69.215
  Bottom Layer w0.762: v1(53.086,76.479) 54.737,78.13 v1(54.737,82.601) ; P4.1@57.252,98.247 58.547,98.247 59.233,97.561 59.233,92.431 61.163,90.5 v1(77.927,90.5) ; v1(59.157,74.295) 59.157,84.023 60.985,85.852 v1(65.126,85.852) ; 75.844,69.215 75.844,76.759 v1(79.096,80.01)
  other v1: 74.905,68.275
MCU_REF: Q7.2 R82.2 R83.1 U1.28 | length 8.8
  Top Layer w0.254: U1.28@75.184,79.795 76.923,79.795 78.486,78.232 R82.2@80.288,78.232 R83.1@80.288,76.835 80.288,75.208 Q7.2@80.264,75.184
mcu_rst: C59.2 R74.2 U1.7 | length 11.3
  Top Layer w0.254: U1.7@68.184,71.795 68.148,71.759 68.148,69.901 68.961,69.088 70.268,69.088 71.501,67.855 71.501,64.643 C59.2@71.882,64.262 R74.2@71.882,62.865
MCU_UH: U1.8 U18.2 | length 48.2
  Top Layer w0.254: U1.8@68.684,71.795 68.684,72.621 69.215,73.152 v2(69.342,73.152) ; v2(72.898,60.96) 73.914,59.944 73.914,30.607 74.417,30.104 U18.2@75.159,30.104
  Bottom Layer w0.254: v2(69.342,73.152) 70.409,73.152 72.923,70.637 72.923,60.985 v2(72.898,60.96)
MCU_UL: U1.62 U18.3 | length 60.8
  Top Layer w0.254: U1.62@62.684,75.295 64.754,75.295 66.929,77.47 70.866,77.47 70.993,77.597 v2(70.993,77.724) ; v2(73.152,59.69) 73.406,59.436 73.406,29.845 74.417,28.834 U18.3@75.159,28.834
  Bottom Layer w0.254: v2(70.993,77.724) 70.993,73.33 73.584,70.739 73.584,60.122 v2(73.152,59.69)
MCU_VH: U1.9 U19.2 | length 55.1
  Top Layer w0.254: v2(56.439,69.063) 57.912,67.589 57.912,30.358 58.166,30.104 U19.2@59.03,30.104 ; v2(68.834,70.355) 69.184,70.705 U1.9@69.184,71.795
  Bottom Layer w0.254: v2(56.439,69.063) 57.731,70.355 v2(68.834,70.355)
MCU_VL: U1.58 U19.3 | length 67.5
  Top Layer w0.254: v2(50.165,76.708) 50.752,77.295 U1.58@62.684,77.295 ; v2(51.486,67.107) 55.829,67.107 57.404,65.532 57.404,29.464 58.034,28.834 U19.3@59.03,28.834
  Bottom Layer w0.254: v2(50.165,76.708) 50.165,70.444 51.511,69.098 51.511,67.132 v2(51.486,67.107)
MCU_WH: U1.10 U20.2 | length 64.9
  Top Layer w0.254: U20.2@43.272,30.099 42.443,30.099 42.037,30.505 42.037,33.565 44.704,36.232 44.704,62.687 49.835,67.818 v2(56.058,67.818) ; U1.10@69.684,71.795 69.684,70.397 v2(69.977,70.104)
  Bottom Layer w0.254: v2(56.058,67.818) 56.134,67.818 56.159,67.793 58.036,69.669 69.542,69.669 v2(69.977,70.104)
MCU_WL: U1.57 U20.3 | length 68.5
  Top Layer w0.254: U20.3@43.272,28.829 42.291,28.829 41.504,29.616 41.504,33.68 44.145,36.322 44.145,62.941 49.708,68.504 v2(50.825,68.504) ; v2(49.276,77.216) 49.855,77.795 U1.57@62.684,77.795
  Bottom Layer w0.254: v2(49.276,77.216) 49.276,70.053 v2(50.825,68.504)
MEA: Q6.3 R24.2 S_RX.1 U1.19 | length 92.2
  Top Layer w0.254: v2(67.773,75.184) 68.332,75.743 69.76,75.743 70.208,75.295 U1.19@75.184,75.295
  Top Layer w0.508: S_RX.1@35.738,12.694 R24.2@37.516,12.694 Q6.3@37.516,11.043
  Bottom Layer w0.254: v2(36.664,12.718) 45.644,21.698 45.644,48.819 52.857,56.032 52.857,69.825 56.058,73.025 65.614,73.025 v2(67.773,75.184)
MEB: Q8.3 R38.2 S_RX1.1 U1.13 | length 95.4
  Top Layer w0.254: U1.13@71.184,71.795 71.184,70.421 v2(71.374,70.231)
  Top Layer w0.508: S_RX1.1@32.436,12.694 33.986,12.694 R38.2@34.01,12.718 Q8.3@34.01,11.043
  Bottom Layer w0.254: v2(33.235,12.718) 34.904,11.049 46.685,11.049 47.65,12.014 47.65,48.006 54.991,55.347 54.991,65.608 58.598,69.215 70.358,69.215 v2(71.374,70.231)
  Bottom Layer w0.508: v2(33.235,12.718) v2@33.253,12.718
MEZ: Q9.3 R39.2 S_RX2.1 U1.51 | length 94.2
  Top Layer w0.254: U1.51@62.684,80.795 65.636,80.795 v2(65.913,80.518)
  Top Layer w0.508: S_RX2.1@28.88,12.718 v2(29.806,12.718) R39.2@30.531,12.718 Q9.3@30.531,11.043
  Bottom Layer w0.254: v2(29.806,12.718) 45.11,28.023 45.11,48.971 52.299,56.159 52.299,70.028 55.778,73.508 63.856,73.508 65.913,75.565 v2(65.913,80.518)
Motor_U: C54.1 P2.6 T10.1 U15.1 U15.2 U15.3 U18.6 U21.5 | length 52.6
  Top Layer w0.762: U18.6@80.909,28.834 T10.1@87.249,28.834 87.909,29.494 v2(87.909,30.836) 87.909,31.217 87.244,31.882 C54.1@85.338,31.882
  Bottom Layer w1.524: P2.6@65.42,3.81 65.42,16.55 70.18,21.311 74.498,21.311 82.525,29.337 88.138,29.337
Motor_V: C55.1 P2.7 T11.1 U16.1 U16.2 U16.3 U19.6 U22.5 | length 46.5
  Top Layer w0.762: U19.6@64.78,28.834 T11.1@71.252,28.834 72.009,29.591 v2(72.009,30.836) 72.009,31.267 71.394,31.882 C55.1@69.322,31.882
  Bottom Layer w1.524: P2.7@62.92,3.81 62.92,28.122 64.037,29.239 71.564,29.239 U22.5@72.222,28.581
Motor_W: C56.1 P2.8 T12.1 U17.1 U17.2 U17.3 U20.6 U23.5 | length 41
  Top Layer w0.762: U20.6@49.047,28.829 T12.1@55.372,28.829 56.185,29.642 v2(56.185,30.836) 56.185,31.293 55.596,31.882 C56.1@53.487,31.882
  Bottom Layer w1.524: 56.513,29.931 56.98,29.464 59.055,29.464 60.42,28.099 P2.8@60.42,3.81
MSR0: D7.2 R19.2 R22.2 | length 6.3
  Top Layer w0.254: D7.2@17.166,108.476 18.651,108.476 19.558,107.569 R22.2@19.558,106.021 20.296,106.021 20.939,106.664 R19.2@21.269,106.664
MU: Q10.3 R92.2 S_RX3.1 U1.38 | length 90.3
  Top Layer w0.254: v2(70.184,82.042) U1.38@70.184,84.295
  Top Layer w0.508: S_RX3.1@46.415,12.654 46.461,12.7 v2(46.965,12.7) 47.893,12.7 47.939,12.654 47.914,12.629 Q10.3@47.914,11.003
  Bottom Layer w0.254: v2(46.965,12.7) 47.168,12.903 47.168,48.235 54.483,55.55 54.483,69.19 56.794,71.501 66.675,71.501 70.184,75.01 v2(70.184,82.042) ; v2@70.144,82.082 v2@70.231,82.169
MV: Q11.3 R93.2 S_RX4.1 U1.18 | length 87.9
  Top Layer w0.254: v2(69.215,75.057) 69.444,75.057 69.706,74.795 U1.18@75.184,74.795
  Top Layer w0.508: S_RX4.1@42.977,12.694 v2(43.701,12.694) 44.426,12.694 R93.2@44.45,12.718 Q11.3@44.45,11.043
  Bottom Layer w0.254: v2(43.701,12.694) 46.66,15.653 46.66,48.463 53.924,55.728 53.924,69.367 56.617,72.06 66.345,72.06 69.215,74.93 v2(69.215,75.057)
MW: Q12.3 R94.2 S_RX5.1 U1.55 | length 92.3
  Top Layer w0.254: U1.55@62.684,78.795 68.127,78.795 v2(68.453,79.121)
  Top Layer w0.508: v2(40.22,12.718) 40.944,12.718 R94.2@40.968,12.694 Q12.3@40.968,11.043
  Bottom Layer w0.254: v2(40.22,12.718) 46.152,18.65 46.152,48.641 53.391,55.88 53.391,69.571 56.363,72.542 66.102,72.542 68.459,74.9 68.459,79.115 v2(68.453,79.121) v2@68.453,79.283
NetC12_1: C12.1 U2.22 | length 4.2
  Top Layer w0.254: U2.22@32.025,125.218 32.025,124.185 32.893,123.317 33.528,123.317 34.195,122.65 C12.1@34.195,122.301
NetC13_1: C13.1 U2.21 | length 3.5
  Top Layer w0.254: U2.21@31.375,125.218 31.375,123.946 32.884,122.437 C13.1@32.884,122.301
NetC16_1: C16.1 U2.16 | length 7.2
  Top Layer w0.254: C16.1@23.273,122.301 23.273,122.968 23.622,123.317 27.432,123.317 28.125,124.01 U2.16@28.125,125.218
NetC17_1: C17.1 U2.14 U2.15 | length 6.7
  Top Layer w0.254: C17.1@24.011,128.651 25.146,128.651 26.825,126.972 26.825,126.111 ; U2.14@26.825,125.218 26.825,126.111 ; U2.15@27.475,125.218 27.475,125.941 27.305,126.111 26.825,126.111